# EAGLE board nRF24L01-Chip-v12 (EAGLE 6.2)
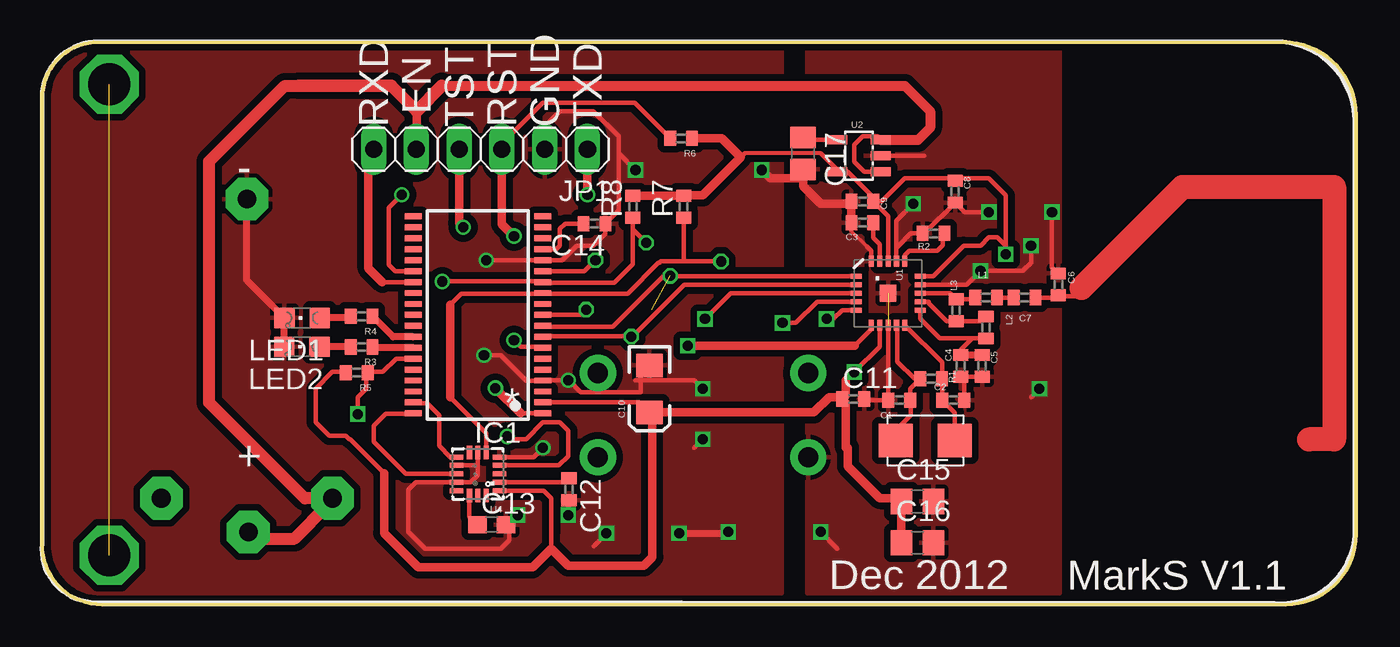
[diagram p0: board, top side]
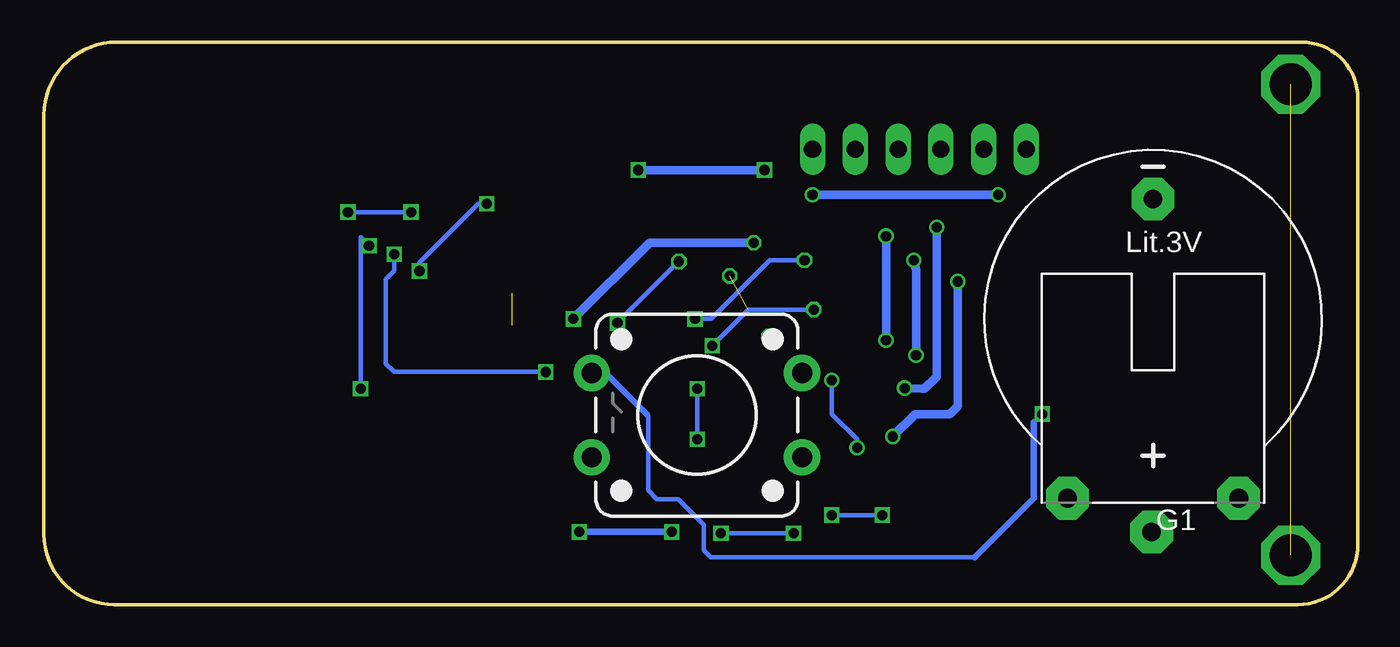
[diagram p1: board, bottom side, seen from below]

Size 78.07 x 33.42 mm. Coordinates in mm from the lower left corner, seen from the top.
Outline: 3.56,0 73.9,0 arc90 78.07,4.17 78.07,29.08 arc90 73.73,33.42 3.35,33.42 arc90 0,30.06 0,3.56 arc90 3.56,0
Copper layers (1*16): Top 0.035mm / dielectric 1.5mm / Bottom 0.035mm
Design rules: minimum track width 6mil, minimum drill 12mil, track to track 6mil, track to pad 6mil, pad to pad 6mil, via to via 6mil, smd to smd 0mil, copper to edge 10mil, drill to drill 10mil, minimum pad ring 10mil, minimum via ring 6mil, stop-mask expansion 2mil, vias tented up to drill 100mil, thermal gap 10mil

## Footprints (pad centres in the part's own frame; a part is rotated, then mirrored left to right if it is on the bottom)
C0402 = smd 0.7 x 0.9: 1 -0.65,0; 2 0.65,0
EIA3216 = smd 1.4 x 1.6: A 1.4,0; C -1.4,0
C0603 = smd 1.1 x 1: 1 -0.85,0; 2 0.85,0
C0805 = smd 1.3 x 1.5: 1 -0.95,0; 2 0.95,0
CR2032H = drill 1.118 pad 2.54 octagon: + 5.08,10.795; +@1 -5.08,10.795; - 0,-6.985
TSSOP38_R-PDSO-G38-DA = smd 0.35 x 1: 1 -5.85,-3.85; 2 -5.2,-3.85; 3 -4.55,-3.85; 4 -3.9,-3.85; 5 -3.25,-3.85; 6 -2.6,-3.85; 7 -1.95,-3.85; 8 -1.3,-3.85; 9 -0.65,-3.85; 10 0,-3.85; 11 0.65,-3.85; 12 1.3,-3.85; 13 1.95,-3.85; 14 2.6,-3.85; 15 3.25,-3.85; 16 3.9,-3.85; 17 4.55,-3.85; 18 5.2,-3.85; 19 5.85,-3.85; 20 5.85,3.85; 21 5.2,3.85; 22 4.55,3.85; 23 3.9,3.85; 24 3.25,3.85; 25 2.6,3.85; 26 1.95,3.85; 27 1.3,3.85; 28 0.65,3.85; 29 0,3.85; 30 -0.65,3.85; 31 -1.3,3.85; 32 -1.95,3.85; 33 -2.6,3.85; 34 -3.25,3.85; 35 -3.9,3.85; 36 -4.55,3.85; 37 -5.2,3.85; 38 -5.85,3.85
1X06 = drill 1.016 long: 1 -6.35,0; 2 -3.81,0; 3 -1.27,0; 4 1.27,0; 5 3.81,0; 6 6.35,0
CHIPLED_0805 = smd 1.2 x 1.2: A 0,-1.05; C 0,1.05
CRSYTAL1 = smd 2 x 2: P$3 -2,0; P$4 1.5,0
R0402 = smd 0.7 x 0.9: 1 -0.65,0; 2 0.65,0
TACTILE-PTH-12MM = drill 1.2 pad 2.159: 1 6.25,-2.5; 2 -6.25,-2.5; 3 6.25,2.5; 4 -6.25,2.5
QFN20 = smd 1 x 1: 0 0,0 | smd 0.65 x 0.3: 1 -1.9,1; 2 -1.9,0.5; 3 -1.9,0; 4 -1.9,-0.5; 5 -1.9,-1; 11 1.9,-1; 12 1.9,-0.5; 13 1.9,0; 14 1.9,0.5; 15 1.9,1 | smd 0.3 x 0.65: 6 -1,-1.9; 7 -0.5,-1.9; 8 0,-1.9; 9 0.5,-1.9; 10 1,-1.9; 16 1,1.9; 17 0.5,1.9; 18 0,1.9; 19 -0.5,1.9; 20 -1,1.9
SOT23-5 = smd 0.55 x 1.2: 1 -0.95,-1.3; 2 0,-1.3; 3 0.95,-1.3; 4 0.95,1.3; 5 -0.95,1.3
QFN-16_0.5MM = smd 0.8 x 0.3: 1 -1.275,1; 2 -1.275,0.5; 3 -1.275,0; 4 -1.275,-0.5; 5 -1.275,-1; 9 1.275,-1; 10 1.275,-0.5; 11 1.275,0; 12 1.275,0.5; 13 1.275,1 | smd 0.3 x 0.8: 6 -0.5,-1.275; 7 0,-1.275; 8 0.5,-1.275; 14 0.5,1.275; 15 0,1.275; 16 -0.5,1.275

## Placement (x,y rotation side)
C1  22pF  [C0402]  50.93,12.14 180 top
C2  22pF  [C0402]  54.13,12.14 0 top
C3  33nF  [C0402]  48.74,22.69 180 top
C4  2.2nF  [C0402]  54.58,14.18 270 top
C5  4.7pF  [C0402]  55.85,14.18 270 top
C6  1.0pF  [C0402]  60.38,19.02 270 top
C7  1.5pF  [C0402]  58.37,18.24 0 top
C8  10nF  [C0402]  54.24,24.53 90 top
C9  1nF  [C0402]  48.74,23.96 0 top
C10  10uF  [EIA3216]  36.09,12.81 270 top
C11  0.1u  [C0402]  48.2,12.21 0 top
C12  0.1u  [C0402]  31.31,6.85 270 top
C13  4.7u  [C0603]  26.71,4.75 0 top
C14  10nF  [C0402]  32.82,22.63 180 top
C15  10nF  [C0805]  52.01,6.13 0 top
C16  10nF  [C0805]  52.01,3.67 0 top
C17  0.01uF  [C0805]  45.21,26.8 270 top
G1  CR2032H  [CR2032H]  12.17,17.11 180 bottom
IC1  MSP430F2274IDA  [TSSOP38_R-PDSO-G38-DA]  25.89,17.21 90 top
JP1  [1X06]  26.05,27.05 180 top
L1  3.9nH  [C0402]  56.09,18.24 0 top
L2  2.7nH  [C0402]  56.08,16.46 90 top
L3  8.2nH  [C0402]  54.31,17.49 90 top
LED1  [CHIPLED_0805]  15.45,17.03 90 top
LED2  [CHIPLED_0805]  15.43,15.32 90 top
Q1  SMAQ-5032A  [CRSYTAL1]  52.72,9.75 0 top
R1  1M  [C0402]  52.82,13.41 0 top
R2  22K  [C0402]  52.96,22.05 180 top
R3  400R  [C0402]  18.99,15.3 180 top
R4  400R  [C0402]  18.99,17.13 180 top
R5  47k  [C0402]  18.7,13.78 180 top
R6  47k  [C0402]  37.97,27.7 180 top
R7  4.7k  [R0402]  38.12,23.64 90 top
R8  4.7k  [R0402]  35.1,23.64 90 top
S2  SWITCH-MOMENTARY-212MM  [TACTILE-PTH-12MM]  39.27,11.25 180 bottom
U1  NRF24L01SMD  [QFN20]  50.26,18.5 0 top
U2  3.3V  [SOT23-5]  48.53,26.67 90 top
U4  MMA8452Q  [QFN-16_0.5MM]  25.89,7.76 180 top

## Library data of the parts
C1-C10 L1-L3 R1-R6 U1 U2 = SparkFun
C11-C17 R7 R8 = rcl
G1 = battery
IC1 = texas; MPN: MSP430F2274IDA; OC_FARNELL: 1610179; OC_NEWARK: 28M6350
JP1 = pinhead
LED1 LED2 = led
Q1 = Crystal1
S2 = SparkFun-Electromechanical
U4 = SparkFun-Sensors

## Nets
ANT: C6.2 C7.2
GND: C1.2 C2.2 C3.2 C4.2 C5.2 C6.1 C8.1 C9.1 C10.C C11.2 C12.2 C13.2 C14.1 C15.2 C16.2 C17.2 G1.- IC1.4 IC1.15 JP1.2 LED1.C LED2.C R2.2 S2.3 U1.0 U1.8 U1.14 U1.17 U1.20 U2.2 U4.5 U4.7 U4.10 U4.12
N$1: C1.1 Q1.P$3 R1.1 U1.9
N$2: IC1.1 JP1.4
N$3: L2.2 L3.1 U1.12
N$4: R2.1 U1.16
N$5: C3.1 U1.19
N$6: L1.1 L3.2 U1.13
N$7: C4.1 C5.1 L2.1 U1.11
N$8: IC1.9 U1.1
N$9: C7.1 L1.2
N$10: IC1.8 U1.2
N$11: IC1.14 U1.3
N$12: IC1.12 R7.1 U1.4 U4.6
N$13: IC1.13 R8.1 U1.5 U4.4
N$14: IC1.25 JP1.1
N$15: IC1.10 U1.6
N$16: IC1.32 R3.1
N$17: LED2.A R3.2
N$18: LED1.A R4.2
N$19: IC1.33 R5.1 S2.1
N$20: C17.1 U2.4
N$21: IC1.26 JP1.6
N$22: C14.2 IC1.16
N$23: IC1.31 R4.1
N$24: C2.1 Q1.P$4 R1.2 U1.10
N$28: IC1.7 JP1.3 R6.2
N$30: C12.1 U4.2
N$32: IC1.38 U4.11
N$33: IC1.37 U4.9
N$34: C13.1 U4.14
RAW: G1.+ JP1.5 U2.1 U2.3
VCC: C8.2 C9.2 C10.A C11.1 C15.1 C16.1 IC1.2 R5.2 R6.1 R7.2 R8.2 U1.7 U1.15 U1.18 U2.5 U4.1

## Tracks (layer width: path | path; a pad name or v marks a point on that pad's centre or on a via)
ANT
  Top 0.279: C7.2 60.25,18.24 C6.2
GND  (via drill 0.6)  (1 unrouted)
  Top 0.203: 48.09,22.7 48.09,22.19 48.99,21.29
  Top 0.254: C3.2 48.09,22.7 | 48.99,21.29 49.26,21.02 U1.20 | 25.47,7.26 22.2,7.26 21.75,6.82 21.75,4.32 22.75,3.32 27.25,3.32 27.75,3.82 27.75,4.55 C13.2 | v46.25,4.32 47.25,3.32 | C1.2 48.91,12.14 C11.2 | v56.25,23.32 54.81,23.32 C8.1 52.41,22.05 R2.2 | 50.74,21.18 50.74,22.8 v51.75,23.82 | U1.14 54.93,18.99 v55.75,19.82 58.25,19.82 58.75,20.32 v58.75,21.32 | v59.25,12.82 58.75,12.32 | v60,23.32 60,20.05 C6.1 | 32.77,3.48 v33.53,4.24 | v31.25,13.32 31.3,13.32 32,12.62 35.56,12.62 35.56,13.69 C10.C
  Top 0.279: 52.24,22.07 R2.2 51.61,22.05 50.74,21.18 50.74,20.42 U1.17 | C1.2 50.28,16.58 U1.8 | C2.2 54.78,13.32 C4.2 C5.2 | U4.12 25.47,7.26 25.89,7.68 25.89,8.24 | 25.89,8.24 U4.7 | U4.10 25.87,8.26 25.89,8.24 | JP1.2 29.86,28.42 30.75,29.32 32.75,29.32 34.25,27.82 34.25,26.82 | 34.25,26.82 34.25,23.41 C14.1 33.47,22.03 32.75,21.32 31.75,21.32 30.9,20.46 IC1.15 v26.4,20.46 | 34.25,26.82 v35.25,25.82 | 45.18,25.82 C17.2 45.21,25.32 | 47.95,23.82 C9.1 | U2.2 52.4,26.67 | v31.25,13.32 29.75,13.32 IC1.4 28.76,13.31 27.25,14.82 v26.25,14.82 | 36.19,14.32 C10.C | v31.25,5.32 31.25,6.15 C12.2 | U4.5 29.2,8.76 v29.75,9.32 | C13.2 27.68,4.75 v28.25,5.32 | 35.25,13.32 38.75,13.32 v39.25,12.82 | v39.25,9.82 38.75,9.32
  Top 0.406: 38.1,4.24 40.89,4.24 | LED2.C 14.4,15.33 LED1.C 12.17,19.25 G1.-
  Top 0.5: C9.1 48.09,22.7 | 47.95,23.82 46.25,23.82 45.21,24.86 45.21,25.32 43.25,25.32 v42.75,25.82
  Bottom 0.254: v51.75,23.82 52.25,23.82 55.75,20.32 v55.75,19.82 | v58.75,21.32 59.25,21.82 v59.25,12.82 | v33.53,4.24 v37.85,4.24
  Bottom 0.279: v56.25,23.32 v60,23.32 | v31.25,13.32 31.25,11.32 29.75,9.82 v29.75,9.32 | v28.25,5.32 v31.25,5.32 | v39.25,12.82 v39.25,9.82
  Bottom 0.381: v40.77,4.32 v46.25,4.32
  Bottom 0.5: v35.25,25.82 v42.75,25.82 | v26.25,14.82 26.25,19.82 v26.4,20.46
  pour Top (isolate 0.406): 43.94,32.94 3.72,32.94 arc90 0.51,29.73 0.51,3.47 arc90 3.29,0.68 43.94,0.68
  pour Top (isolate 0.406): 46.23,32.94 45.47,32.94 45.47,0.68 60.45,0.68 60.45,1.44 60.45,32.94
N$1
  Top 0.279: U1.9 50.82,16.59 50.82,14.43 51.83,13.41 R1.1 51.58,12.83 C1.1 51.61,12.11 51.61,11.26 50.72,10.37 Q1.P$3
N$2  (via drill 0.6)
  Top 0.279: IC1.1 28.43,11.36
  Top 0.5: 28.43,11.36 v26.93,12.86 | JP1.4 24.78,22.66 v25.03,22.42
  Bottom 0.279: 25.89,12.82 25.75,12.82
  Bottom 0.5: v25.03,22.42 25.03,13.54 25.75,12.82 | 25.89,12.82 v26.93,12.86
N$3
  Top 0.254: U1.12 52.28,17.99 52.29,17.99 52.67,17.99 52.67,17.9 53.75,16.82 54.29,16.82 L3.1 55.8,16.84 L2.2
  Top 0.279: 55.85,17.34 L2.2
N$4
  Top 0.279: U1.16 51.26,20.75 51.53,21.02 53.2,21.02 53.52,21.34 53.52,21.96 R2.1
N$5
  Top 0.254: U1.19 49.76,21.41 49.39,21.78 C3.1
N$6
  Top 0.254: U1.13 53.95,18.49 L3.2 55.33,18.14 L1.1
N$7
  Top 0.203: 54.56,14.83 C4.1 | 54.56,14.83
  Top 0.254: U1.11 52.16,16.97 53.32,15.81 55.25,15.81 L2.1
  Top 0.279: 54.58,14.81 54.58,15.14 55.25,15.81
  Top 0.406: 54.56,14.83 C5.1 | 54.58,14.81 | 54.58,14.81 C4.1
N$8
  Top 0.279: U1.1 36.91,19.49 33.91,16.49 29.81,16.49 IC1.9
N$9
  Top 0.279: L1.2 C7.1
N$10
  Top 0.279: U1.2 38.16,18.99 35.1,15.94 29.77,15.94 IC1.8
N$11  (via drill 0.6)
  Top 0.279: U1.3 40.91,18.49 v39.39,16.97 | IC1.14 32.22,19.81 v32.88,20.46
  Bottom 0.279: v32.88,20.46 34.94,20.46 38.43,16.97 v39.39,16.97
N$12  (via drill 0.6)
  Top 0.279: R7.1 38.12,20.38 | 38.12,20.38 36.77,20.38 36.69,20.3 36.61,20.3 34.78,18.48 29.77,18.48 IC1.12 29.71,18.48 24.92,18.48 24.25,17.82 | U1.4 46.05,17.99 44.78,16.73 v43.99,16.73 | 38.12,20.38 v40.34,20.38 | U4.6 26.39,10.18 24.25,12.32
  Top 0.5: 24.25,17.82 24.25,12.32
  Bottom 0.279: v40.34,20.38 v43.99,16.73
N$13  (via drill 0.6)
  Top 0.279: U1.5 47.53,17.49 47.01,16.97 v46.61,16.97 | v35.89,21.49 35.1,22.29 R8.1 35.1,20.22 33.99,19.11 29.79,19.11 IC1.13 29.71,19.19 v23.78,19.19 | U4.4 30.7,8.26 31.25,8.82 31.25,10.32 30.75,10.82 29.75,10.82 28.75,9.82 27.81,9.82 v27.64,9.99 27.72,9.91
  Bottom 0.5: v35.89,21.49 42.09,21.49 v46.61,16.97 | v23.78,19.19 23.78,11.79 24.25,11.32 26.31,11.32 v27.64,9.99
N$14  (via drill 0.6)
  Top 0.279: IC1.25 20.99,19.81 20.6,20.2 20.6,23.58 v21.37,24.35
  Top 0.5: JP1.1 v32.4,24.35
  Bottom 0.5: v32.4,24.35 v21.37,24.35
N$15  (via drill 0.6)  (1 unrouted)
  Top 0.279: U1.6 49.26,16.37 48.28,15.38 | IC1.10 32,17.21 v32.32,17.53
  Top 0.5: 48.28,15.38 v38.35,15.38
  Bottom 0.279: v32.32,17.53 36.21,17.53 v38.35,15.38
  other vias: 37.32,19.53
N$16
  Top 0.406: IC1.32 19.64,15.26 R3.1
N$17
  Top 0.406: R3.2 18.32,15.32 LED2.A
N$18
  Top 0.406: R4.2 18.23,17.03 LED1.A
N$19  (via drill 0.6)
  Top 0.279: v18.75,11.32 18.75,12.32 19.25,12.82 19.25,13.69 R5.1 19.38,13.82 20.25,13.82 21.05,14.61 IC1.33
  Bottom 0.254: 22.75,2.82 38.46,2.82 38.86,3.22 38.86,4.75 40.39,6.27 41.66,6.27 42.16,6.78 42.16,11.23 42.25,11.32
  Bottom 0.279: 19.25,10.82 v18.75,11.32
  Bottom 0.381: S2.1 44.69,13.75 42.25,11.32 | 22.75,2.82 19.25,6.32 19.25,10.82
N$20
  Top 0.279: U2.4 45.34,27.62 C17.1
N$21
  Top 0.279: IC1.26 20.21,19.16
  Top 0.5: 20.21,19.16 19.38,19.99 19.38,26.73 JP1.6
N$22
  Top 0.279: IC1.16 30.55,21.11 30.75,21.32 30.75,22.32 31.07,22.63 C14.2
N$23
  Top 0.406: IC1.31 20.86,15.91 R4.1
N$24
  Top 0.279: U1.10 53.47,14.39 R1.2 53.47,12.16 C2.1 54.22,11.41 Q1.P$4
N$28  (via drill 0.6)
  Top 0.279: v28.04,15.7 28.43,15.3 29.7,15.3 IC1.7 | JP1.3 27.32,27.38 29.75,29.82 35.2,29.82 R6.2
  Top 0.5: JP1.3 27.32,22.61 v28.04,21.89
  Bottom 0.5: v28.04,21.89 v28.04,15.7
N$29  (via drill 1.1 pad 2.54)
  other vias: 12.25,4.32
N$30
  Top 0.279: U4.2 31.07,7.26 C12.1
N$31
  Top 0.279: 60.25,18.32 61.75,18.32 61.75,18.82
  Top 1.421: 61.75,18.82 67.75,24.82 76.75,24.82 76.75,9.82 75.25,9.82
N$32
  Top 0.279: U4.11 21.61,7.76 19.7,9.67 19.7,10.62 20.41,11.33 22.02,11.33 IC1.38
N$33
  Top 0.279: U4.9 24.26,8.76 23.59,9.43 23.59,11.26 22.88,11.97 22.08,11.97 IC1.37
N$34
  Top 0.254: U4.14 25.39,5.21 C13.1
N$35  (via drill 2.5)  (1 unrouted)
  other vias: 4,2.92 4,30.92
N$36  (via drill 0.6)
  other vias: 35,15.92
N$37
  Top 0.7: 12,3.92 15,3.92 17,5.92
RAW
  Top 0.279: 49.9,27.69 U2.3 49.63,27.82 48.75,27.82 48.25,27.32 48.25,26.32 48.85,25.72 U2.1 | 22.24,28.16 22.24,27.83 22.25,27.82 | JP1.5 22.24,29.3 22.25,29.32
  Top 0.5: 22.25,27.82 22.25,29.32
  Top 0.508: JP1.5 22.24,28.16 | 49.84,27.61 U2.3
  Top 0.6: 23.75,30.82 51.25,30.82 52.75,29.32 52.75,28.32 52.04,27.61 49.84,27.61
  Top 0.7: G1.+ 15.61,6.31 9.93,11.99 9.93,26.32 14.42,30.82 15.25,30.82
  Top 0.75: 23.75,30.82 22.25,29.32 20.75,30.82 15.25,30.82
VCC  (via drill 0.6)
  Top 0.25: 46.25,26.82 41.75,26.82
  Top 0.254: C9.2 49.39,24.19 47.86,25.72 U2.5 | 18.05,10.02 18.25,9.82 18.3,9.82 20.32,7.79 | 30.25,3.32 30.25,4.32 | 47.75,9.32 47.87,9.32 | 50.87,6.32 C15.1 | U1.15 52.93,19.49 54.75,21.32 55.75,21.32 56.25,21.82 56.75,21.82 57.25,21.32 | 57.25,21.32 v57.25,20.82 | 57.25,21.32 57.25,24.32 56.25,25.32 54.11,25.32 | 54.11,25.32 51.25,25.32 49.89,23.96 | 54.11,25.32 C8.2
  Top 0.279: U1.18 50.26,23.08 C9.2 49.89,23.96 | 38.25,24.43 R7.2 38.15,24.32 | U2.5 47.23,25.84 46.25,26.82 | 41.75,26.82 41.5,26.57 | IC1.2 35.49,12.01 C10.A 36.25,11.25 | 47.44,12.32 C11.1 | U1.7 49.76,15.32 v48.25,13.82 47.75,13.32 | 47.75,12.42 C11.1 | C11.1 47.55,12.08 | 47.75,12 C11.1 | 18.05,10.02 17.05,10.02 16.25,10.82 16.25,12.82 17.25,13.82 18.01,13.82 R5.2 | U4.1 29.81,6.76 30.25,6.32 30.25,4.32
  Top 0.5: R8.2 R7.2 | 38.15,24.32 39.25,24.32 41.5,26.57 40.37,27.7 R6.1 | C10.A 45.85,11.41 46.75,12.32 47.44,12.32 | 47.75,13.32 47.75,12.42 | C15.1 C16.1 | 47.75,9.32 47.75,12 | 36.25,11.25 36.25,2.82 35.75,2.32 | 47.87,9.32 47.87,8.2 49.75,6.32 50.87,6.32
  Top 0.508: 35.75,2.32 31.25,2.32 30.25,3.32 29.14,2.21 22.35,2.21 20.32,4.24 20.32,7.79
  Bottom 0.279: v57.25,20.82 57.25,19.82 57.75,19.32 57.75,14.32 57.25,13.82 v48.25,13.82

## Text on the board
tNames: EN | RXD | TST | RST | GND | TXD | Dec 2012 | MarkS V1.1
tValues: DNP
_tsilk: - | . | * | + | .
122bmp: /Users/markshaio/Desktop/July 2012/CEITBMP-2.bmp